# Altium PCB PCB1.PcbDoc
Units mm, origin at the board's own origin, x right, y up, seen from the top; angles counter-clockwise.
Board outline 88.27 x 53.97 mm, 2 copper layers (Top Layer, Bottom Layer); 52 components, 63 nets, 209 pads, 244 vias.
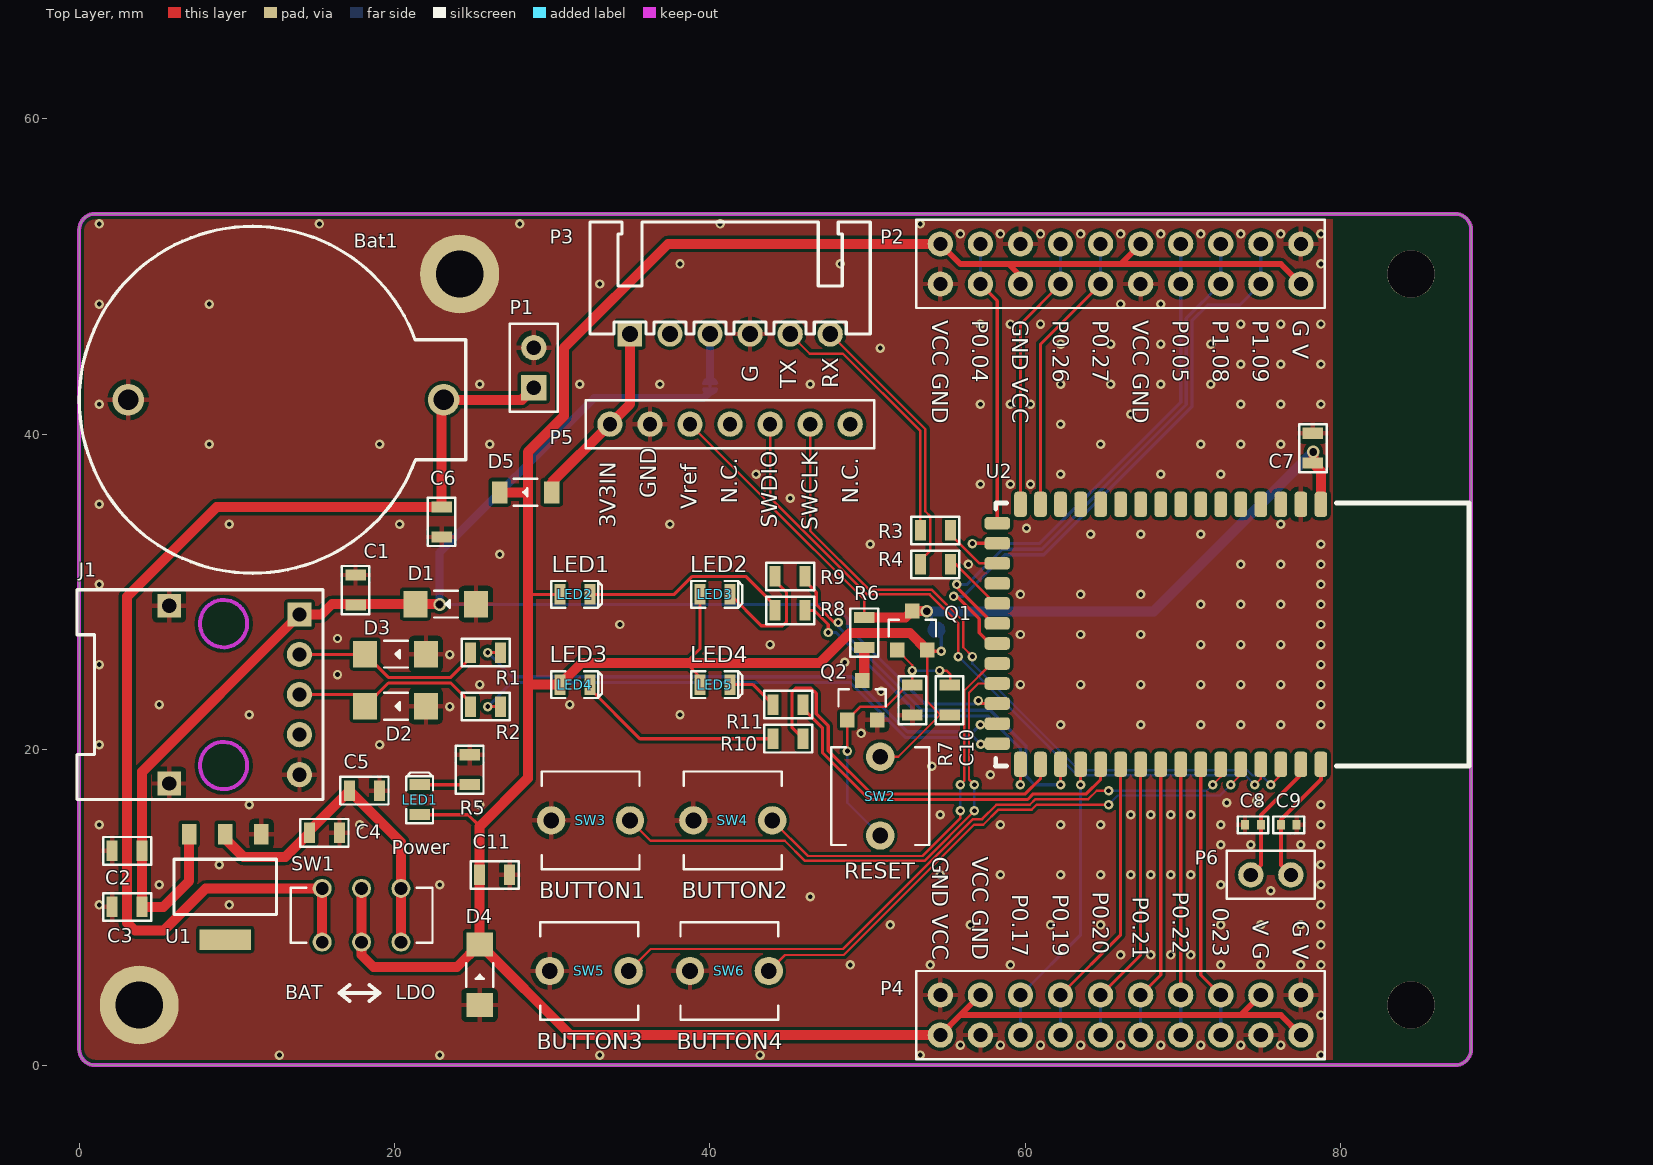
[diagram p0: Top Layer view]
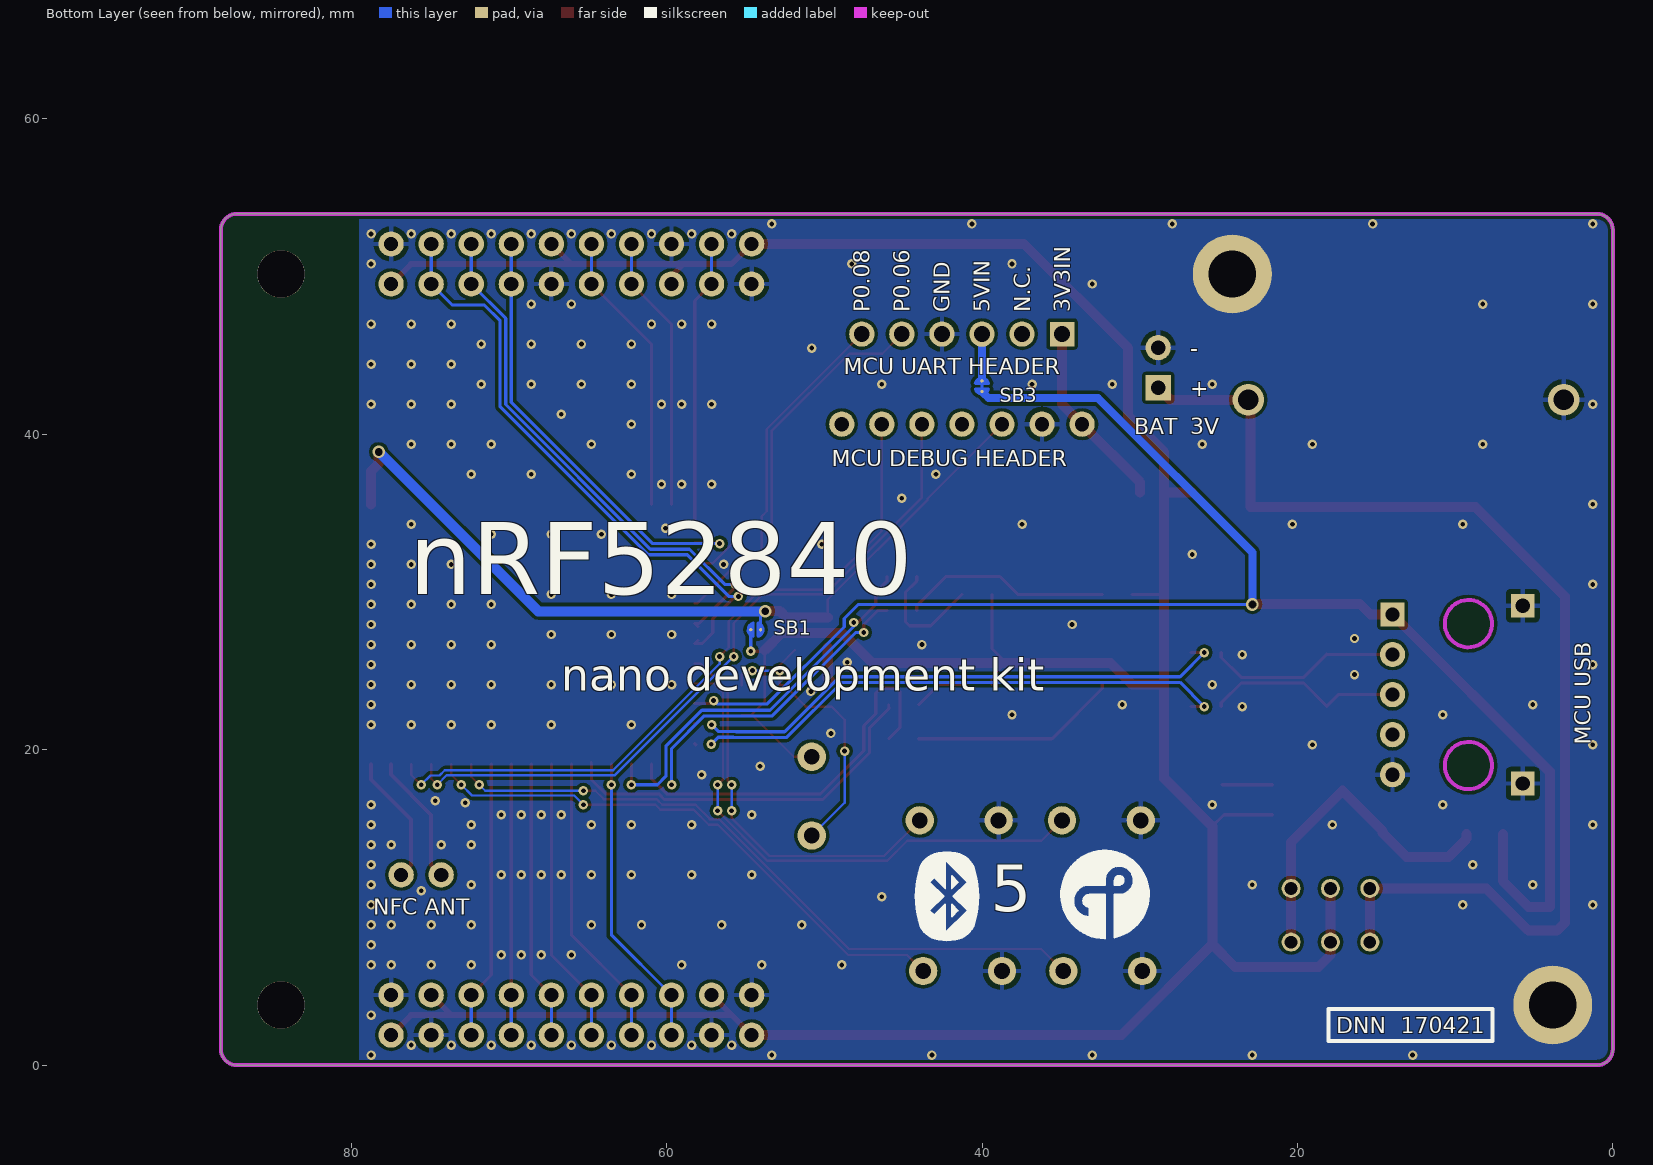
[diagram p1: Bottom Layer view, seen from below]
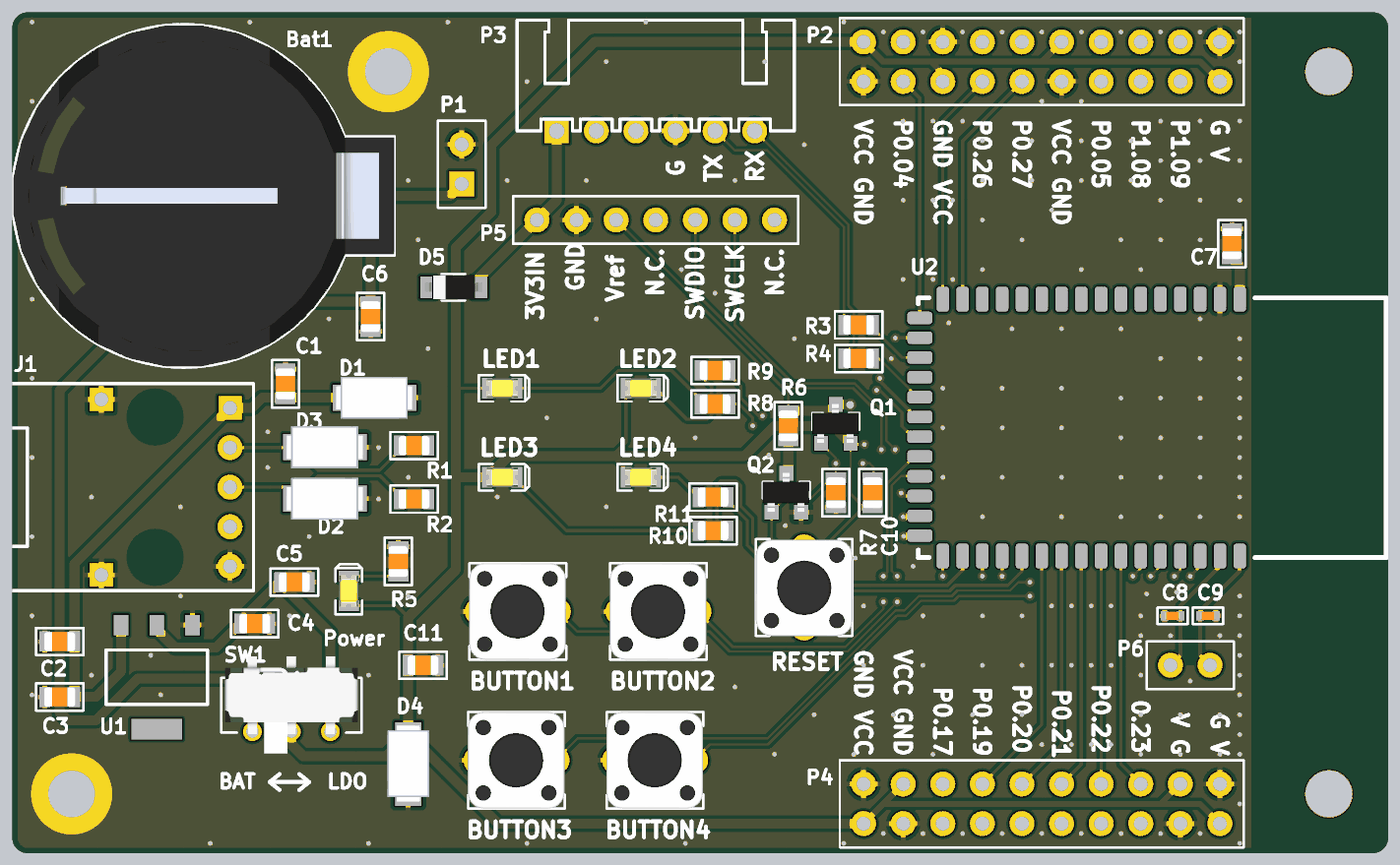
[diagram p2: 3D render of the assembled board from above, using the file's embedded part models]

## Layer stack, top to bottom
Top Solder: solder mask 0.0102, Solder Resist, Dk 3.5
Top Layer: signal copper 0.0356
Dielectric 1: dielectric 0.32, FR-4, Dk 4.8
Bottom Layer: signal copper 0.0356
Bottom Solder: solder mask 0.0102, Solder Resist, Dk 3.5

## Board outline
0,1.016 ccw(c1.016,1.016) 1.016,0 87.249,0 ccw(c87.249,1.016) 88.265,1.016 88.265,52.959 ccw(c87.249,52.959) 87.249,53.975 1.016,53.975 ccw(c1.016,52.959) 0,52.959

## Design rules (kind name [scope] priority, off if disabled: settings)
Clearance Clearance_3 [HasFootprint('Solderbridge_Small') vs InPolygon] p1: gap=0.152 ignorepadtopadclearanceinfootprint=FALSE except(0.203: Arc-Fill Arc-Poly Arc-Region Track-Fill Track-Poly Track-Region SMDPad-Fill SMDPad-Poly SMDPad-Region THPad-Fill THPad-Poly THPad-Region Via-Fill Via-Poly Via-Region Fill-Fill Fill-Poly Fill-Region Poly-Poly Poly-Region Region-Region)
Clearance Clearance_2 [HasFootprint('Solderbridge_Small')] p2: gap=0.152 ignorepadtopadclearanceinfootprint=FALSE
Clearance Clearance_1 [InNet('5V') or InNet('CP2102_3V3') or InNet('CP2102_5V') or InNet('VBAT') or InNet('VDD_nRF') or InNet('VLDO') or InNet('VSYS')] p3: gap=0.203 ignorepadtopadclearanceinfootprint=FALSE
Clearance [All] p4: gap=0.152 ignorepadtopadclearanceinfootprint=FALSE except(0.203: Arc-Fill Arc-Poly Arc-Region Track-Fill Track-Poly Track-Region SMDPad-Fill SMDPad-Poly SMDPad-Region THPad-Fill THPad-Poly THPad-Region Via-Fill Via-Poly Via-Region Fill-Fill Fill-Poly Fill-Region Poly-Poly Poly-Region Region-Region)
DiffPairsRouting [All] p1: maxlimit=0.254 minlimit=0.152 mostfreqgap=0.152 toplayer_minwidth=0.203 toplayer_maxwidth=0.381 toplayer_prefwidth=0.203 bottomlayer_minwidth=0.203 bottomlayer_maxwidth=0.381 bottomlayer_prefwidth=0.203 maxuncoupledlength=12.7
MinimumSolderMaskSliver [All] p1: minsoldermaskwidth=0.152
PolygonConnect PolygonConnect_1 [IsVia and InNet('GND') or (HasPad('Free-1') and InNet('GND'))] p1: connectstyle=Direct reliefconductorwidth=0.254 reliefentries=4 polygonreliefangle="90 Angle" airgapwidth=0.254
PolygonConnect [All] p2: connectstyle=Relief reliefconductorwidth=0.305 reliefentries=4 polygonreliefangle="90 Angle" airgapwidth=0.305
RoutingVias [All] p1: holewidth=0.3 width=0.6 viastyle="Through Hole" minholewidth=0.3 minwidth=0.6 maxholewidth=0.7 maxwidth=1
SilkToSilkClearance [All] p1: silktosilkclearance=0.203
SilkToSolderMaskClearance [IsPad] p1: minsilkscreentomaskgap=0.152 clearancetoexposedcopper=TRUE
SolderMaskExpansion [All] p1: expansion=0.102
Width [All] p1: maxlimit=2.54 minlimit=0.152 preferedwidth=0.203
26 further rules are at their usual default settings.

## Classes and differential pairs
differential pair D': +D'_P -D'_N
differential pair D: +D_P -D_N

## Components (designator, comment, footprint, x,y, rotation, side; value= is the part's Value field where it differs from the comment)
Bat1 "Bat Holder CR2032" CR2032_DIP_PLASTIC 3.114,42.189 r0 top
C1 "100nF" 0805_Imperial 17.526,30.124 r270 top
C2 "10µF" 0805_Imperial 3.048,13.589 r0 top
C3 "100nF" 0805_Imperial 3.048,10.033 r0 top
C4 "100nF" 0805_Imperial 15.555,14.732 r180 top
C5 "10uF" 0805_Imperial 18.095,17.399 r180 top
C6 "10µF" 0805_Imperial 22.987,34.442 r90 top
C7 "100nF" 0805_Imperial 78.232,39.116 r270 top
C8 "N.C." "0402 imperial" 74.43,15.24 r180 top
C9 "N.C." "0402 imperial" 76.7,15.24 r180 top
C10 "100nF" 0805_Imperial 55.194,23.139 r270 top
C11 "10uF" 0805_Imperial 26.35,12.065 r180 top
D1 "TVS" DO-214AC 23.241,29.235 r0 top
D2 "TVS" DO-214AC 20.066,22.758 r0 top
D3 "TVS" DO-214AC 20.066,26.06 r0 top
D4 "TVS" DO-214AC 25.4,5.735 r270 top
D5 "DIODE S4" SOD-123 26.672,36.322 r0 top
J1 "MicroUSB-B" USB-MICRO-B-MODULE 13.97,23.495 r0 top
LED1 "Power" LED_0805 21.59,16.83 r270 top
LED2 "LED1" LED_0805 31.43,29.845 r180 top
LED3 "LED2" LED_0805 40.32,29.845 r180 top
LED4 "LED3" LED_0805 31.43,24.13 r180 top
LED5 "LED4" LED_0805 40.32,24.13 r180 top
P1 "BAT" CONN2.54MM2P#1 28.829,42.951 r90 top
P2 "GPIO Header" CONN2.54MM10X2 77.47,52.07 r180 top
P3 "UART Header" CONNX2.54MM6P 47.625,46.355 r0 top
P4 "GPIO Header" CONN2.54MM10X2 77.47,4.445 r180 top
P5 "Prog & Debug Header" CONN2.54MM7P 33.655,40.64 r0 top
P6 "NFC ANT" CONN2.54MM2P#2 74.295,12.065 r0 top
Q1 "Si2301DS" SOT-23 52.832,27.559 r0 top
Q2 "Si2300" SOT-23 49.657,23.139 r0 top
R1 "22R" 0805_Imperial 25.781,26.162 r0 top
R2 "22R" 0805_Imperial 25.781,22.733 r0 top
R3 "22R" 0805_Imperial 54.295,33.909 r180 top
R4 "22R" 0805_Imperial 54.295,31.75 r180 top
R5 "10K" 0805_Imperial 24.765,18.73 r270 top
R6 "100R" 0805_Imperial 49.784,27.432 r90 top
R7 "100K" 0805_Imperial 52.832,23.139 r90 top
R8 "1K" 0805_Imperial 45.085,28.829 r0 top
R9 "1K" 0805_Imperial 45.085,30.988 r0 top
R10 "1K" 0805_Imperial 44.958,20.701 r0 top
R11 "1K" 0805_Imperial 44.958,22.86 r0 top
SB1 "Solderbridge" Solderbridge_Small 54.356,27.61 r180 bottom
SB3 "Solderbridge" Solderbridge_Shorted 40.005,43.053 r270 bottom net-tie
SW1 "MSS22D18" MSS22D18DIP 20.407,7.801 r0 top
SW2 "RESET" Switch-PB-6.2x6.2-2-PIN-DIP 50.8,17.058 r90 top
SW3 "BUTTON1" Switch-PB-6.2x6.2-2-PIN-DIP 32.432,15.519 r0 top
SW4 "BUTTON2" Switch-PB-6.2x6.2-2-PIN-DIP 41.449,15.519 r0 top
SW5 "BUTTON3" Switch-PB-6.2x6.2-2-PIN-DIP 32.345,5.969 r0 top
SW6 "BUTTON4" Switch-PB-6.2x6.2-2-PIN-DIP 41.235,5.969 r0 top
U1 "AMS1117-3.3" SOT229P700X180-4N 9.271,11.303 r180 top
U2 "nRF52840 module" nRF52840_GT840A01 58.218,34.357 r270 top

## Footprints (in the part's own frame and the unit in brackets; to place one, negate y for a bottom-side part, rotate by r counter-clockwise, add the part's x,y. Pads: shape width x height; smd on the part's side, far side on the other; paste and mask are expansions set on the pad)
"0402 imperial" [mm] "tolerant (L, W)=(0.1, 0.1)"
  rect 0.5x0.6 smd mask+0.05: 1(-0.5,0) 2(0.5,0)
  Top Layer pour cut-out: -0.25,0.3 0.25,0.3 0.25,-0.3 -0.25,-0.3
  silkscreen extent -0.97,-0.53 0.97,0.53, body extent -0.51,-0.25 0.51,0.25, height 0.5
0805_Imperial [mm] "tolerant (L, W)=(0.1, 0.15)"
  rect 0.7x1.3 smd mask+0.05: 1(-0.95,0) 2(0.95,0)
  silkscreen extent -1.53,-0.87 1.53,0.87, body extent -1,-0.62 1,0.63, height 0.77
CONN2.54MM2P#1 [mm]
  rect 1.6x1.6 hole 0.9: 1(0,0)
  round 1.6 hole 0.9: 2(2.54,0)
  silkscreen extent -1.52,-1.52 4.06,1.52, body extent -1.27,-1.27 3.81,1.27, height 8.5
CONN2.54MM2P#2 [mm]
  round 1.6 hole 0.9: 1(0,0) 2(2.54,0)
  silkscreen extent -1.52,-1.52 4.06,1.52, body extent -1.27,-1.27 3.81,1.27, height 8.5
CONN2.54MM7P [mm]
  round 1.6 hole 0.9: 1(0,0) 2(2.54,0) 3(5.08,0) 4(7.62,0) 5(10.16,0) 6(12.7,0) 7(15.24,0)
  silkscreen extent -1.52,-1.52 16.76,1.52, body extent -1.27,-1.27 16.51,1.27, height 8.5
CONN2.54MM10X2 [mm]
  round 1.6 hole 0.9: 1(0,0) 2(0,2.54) 3(2.54,0) 4(2.54,2.54) 5(5.08,0) 6(5.08,2.54) 7(7.62,0) 8(7.62,2.54) 9(10.16,0) 10(10.16,2.54) 11(12.7,0) 12(12.7,2.54) 13(15.24,0) 14(15.24,2.54) 15(17.78,0) 16(17.78,2.54) 17(20.32,0) 18(20.32,2.54) 19(22.86,0) 20(22.86,2.54)
  silkscreen extent -1.52,-1.52 24.38,4.06, body extent -1.27,-1.27 24.13,3.81, height 8.5
CONNX2.54MM6P [mm]
  rect 1.55x1.55 hole 1: 1(-12.7,0)
  round 1.6 hole 1: 2(-10.16,0) 3(-7.62,0) 4(-5.08,0) 5(-2.54,0) 6(0,0)
  silkscreen extent -15.24,0 2.54,7.11, body extent -14.99,0.25 2.79,7.37, height 6
CR2032_DIP_PLASTIC [mm] "PBT PLASTIC"
  round 2 hole 1.3: 1(20,0) 2(0,0)
  silkscreen extent -3.1,-11 21.4,11, body extent -3.1,-11 21.4,11, height 8.5
DO-214AC [mm]
  rect 1.52x1.68 smd: 1(-1.925,0) 2(1.925,0)
  silkscreen extent -0.72,-0.85 0.78,0.85, body extent -2.52,-1.35 2.48,1.35, height 2.15
LED_0805 [mm] "tolerant (L, W)=(0.2, 0.15)"
  rect 0.7x1.3 smd mask+0.05: 1(-0.95,0) 2(0.95,0)
  silkscreen extent -1.73,-0.85 1.5,0.85, body extent -1.01,-0.62 1.01,0.63, height 1.1
MSS22D18DIP [mm]
  round 1.2 hole 0.8: 1(0,0) 2(-2.5,0) 3(-5,0) 4(0,3.4) 5(-2.5,3.4) 6(-5,3.4)
  silkscreen extent -7,-0.05 2,3.45, body extent -6.75,-1.4 1.75,4.85, height 3.5
nRF52840_GT840A01 [mm] "mechanical 31 tolerance 0.75mm"
  rrect50% 1.6x0.8 smd: 1(-1.203,20.522) 2(-1.203,19.252) 3(-1.203,17.982) 4(-1.203,16.712) 5(-1.203,15.442) 6(-1.203,14.172) 7(-1.203,12.902) 8(-1.203,11.632) 9(-1.203,10.362) 10(-1.203,9.092) 11(-1.203,7.822) 12(-1.203,6.552) 13(-1.203,5.282) 14(-1.203,4.012) 15(-1.203,2.742) 16(-1.203,1.472) 29(15.282,1.472) 30(15.282,2.742) 31(15.282,4.012) 32(15.282,5.282) 33(15.282,6.552) 34(15.282,7.822) 35(15.282,9.092) 36(15.282,10.362) 37(15.282,11.632) 38(15.282,12.902) 39(15.282,14.172) 40(15.282,15.442) 41(15.282,16.712) 42(15.282,17.982) 43(15.282,19.252) 44(15.282,20.522)
  rrect50% 0.8x1.6 smd: 17(0,0) 18(1.27,0) 19(2.54,0) 20(3.81,0) 21(5.08,0) 22(6.35,0) 23(7.62,0) 24(8.89,0) 25(10.16,0) 26(11.43,0) 27(12.7,0) 28(13.97,0)
  silkscreen extent -1.28,-0.1 15.38,29.92, body extent -1.28,-0.1 15.28,29.92, height 2
SOD-123 [mm]
  rect 1x1.4 smd: 1(0,0) 2(3.3,0)
  silkscreen extent 0.87,-0.85 2.37,0.85, body extent -0.2,-0.8 3.5,0.8, height 1.27
Solderbridge_Shorted [mm]
  round 0.2 smd paste-10: 1(-0.338,0) 2(0.338,0)
  Top Layer region: 0.102,0.432 0.178,0.505 0.296,0.467 0.361,0.424 0.434,0.351 0.488,0.292 0.546,0.193 0.574,0.099 0.569,-0.122 0.544,-0.193 0.46,-0.33 0.376,-0.411 0.284,-0.469 0.183,-0.5 0.132,-0.483 0.102,-0.43
  Top Layer region: -0.102,-0.432 -0.178,-0.505 -0.296,-0.467 -0.361,-0.424 -0.434,-0.351 -0.488,-0.292 -0.546,-0.193 -0.574,-0.099 -0.569,0.122 -0.544,0.193 -0.46,0.33 -0.376,0.411 -0.284,0.469 -0.183,0.5 -0.132,0.483 -0.102,0.43
  Top Layer lines w0.152: 0.178,0.431 cw(c0.068,0) 0.178,-0.431 ; -0.178,0.431 ccw(c-0.068,0) -0.178,-0.431
  Top Layer lines w0.203: 0.338,0 -0.338,0
Solderbridge_Small [mm]
  round 0.2 smd paste-10: 1(-0.312,0) 2(0.312,0)
  round 1.1 on Bottom Paste mask+0.05: ""(0,0)
  Top Layer region: -0.077,-0.432 -0.152,-0.505 -0.271,-0.467 -0.335,-0.424 -0.409,-0.351 -0.462,-0.292 -0.521,-0.193 -0.549,-0.099 -0.544,0.122 -0.518,0.193 -0.434,0.33 -0.351,0.411 -0.259,0.469 -0.157,0.5 -0.107,0.483 -0.077,0.43
  Top Layer region: 0.077,0.432 0.152,0.505 0.271,0.467 0.335,0.424 0.409,0.351 0.462,0.292 0.521,0.193 0.549,0.099 0.544,-0.122 0.518,-0.193 0.434,-0.33 0.351,-0.411 0.259,-0.469 0.157,-0.5 0.107,-0.483 0.077,-0.43
  Top Layer lines w0.152: 0.153,-0.431 ccw(c0.042,0) 0.461,0.149 ccw(c0.042,0) 0.312,0.353 ccw(c0.042,0) 0.153,0.431 ; -0.153,-0.431 cw(c-0.042,0) -0.305,-0.359 cw(c-0.042,0) -0.312,-0.353 cw(c-0.042,0) -0.487,0 cw(c-0.042,0) -0.153,0.431
SOT229P700X180-4N [mm]
  rect 0.93x1.31 smd: 1(-2.285,-3.345) 2(0.005,-3.345) 3(2.295,-3.345)
  rect 3.24x1.31 smd: 4(0.005,3.345)
  silkscreen extent -3.25,-1.75 3.25,1.75
SOT-23 [mm] "1-G 2-S 3-D"
  rect 0.9x0.95 smd mask+0.05: 1(-0.95,-1.25) 2(0.95,-1.25) 3(0,1.25)
  silkscreen extent -1.51,-0.38 1.5,0.69, body extent -1.52,-1.23 1.48,1.27, height 1.06
Switch-PB-6.2x6.2-2-PIN-DIP [mm] "Single Pole Single Throw (SPST)"
  round 1.8 hole 1: 1(-2.5,0) 2(2.5,0)
  silkscreen extent -3.1,-3.1 3.1,3.1, body extent -3.13,-3.1 3.07,3.1, height 4.8
USB-MICRO-B-MODULE [mm]
  rect 1.5x1.5 hole 0.9: 1(0,5.08) 6(-8.258,-5.634) 6(-8.258,5.634)
  round 1.6 hole 0.9: 2(0,2.54) 3(0,0) 4(0,-2.54) 5(0,-5.08)
  Keep-Out Layer circle w0.254: c-4.81,4.5 r1.5
  Keep-Out Layer circle w0.254: c-4.81,-4.5 r1.5
  silkscreen extent -14.1,-6.65 1.5,6.65, body extent -14.08,-6.65 1.5,6.65, height 1.6

## Part data
Bat1: "Bat Holder CR2032 SMD", Note="Bat Holder CR2032"
C1 C2 C3 C4 C5 C6 C7 C8 C9 C11: library part Capacitor, "common library", Tolerance=±5%
C10: library part Capacitor, "Genaral Schematic", Tolerance=±5%
D1 D2 D3 D4 D5: library part Diode, "common library"
J1: "MicroUSB-B-SMT", 2nd source part number=609-4616-1-ND, Manufacturer="Allen Creations Corp.", Manufacturer Part Number=AJU55-BS2111-L, Part Number=USB-Micro-B-RA-SMD-PiP, Part number IPS=00000007790, 2nd source Supplier=Digi-Key, Artikkelnr Noca=55029020, Artikkelnr Simpro=N.A., Datasheet="\\hizz\pro\app9717\Datasheet\connectores\Allen Creations Corp\AJU-211.pdf", Footprint Doc=USB-Micro-B-RA-SMD-PiP, LatestRevisionDate=2016-04-21, Pin Count=5, Published=2014-10-07, Publisher="Nordic Semiconductor", Supplier=Cabcon, Supplier part number=AJU55-BS2111-L
LED1 LED2 LED3 LED4 LED5: library part LED, "common library", Color=Green
  LED1: Function=Power
  LED2: Function=LED1
  LED3: Function=LED2
  LED4: Function=LED3
  LED5: Function=LED4
P1 P6: library part "Header 2"
P2 P4: library part "Header 10x2"
P3: library part "Header 6", "common library", Compatibility="Pinout of CP2102 USB-UART Module ( at hshop.vn)"
P5: library part "Header 7"
Q1: library part MOS-P, "SOT-23 1-G 2-S 3-D"
Q2: library part MOS-N, "SOT-23 1-G 2-S 3-D"
R1 R2 R3 R4 R5 R8 R9 R10 R11: library part Resistor, "common library", Tolerance=±5%
R6 R7: library part Resistor, "General Schematic", Tolerance=±5%
SB3: "Shorted Solderbridge", Part Number="Solderbridge Shorted", Artikkelnr Noca=N.A., Artikkelnr Simpro=N.A., Footprint Doc=Solderbridge_Shorted, LatestRevisionDate=2012-08-07, Pin Count=2, Published=2012-08-07, Publisher="Nordic Semiconductor"
SW1: "slide switch, DPDT", Pin Count=6
SW2 SW3 SW4 SW5 SW6: library part Push-Button-2, "2-pin"
U1: library part AMS1117, "Low-dropout regulator", Type=AMS1117-3.3
U2: library part nRF52840_GT840A01, "nRF52840 module GT840A_01"
SB1: Artikkelnr Noca=N.A., Artikkelnr Simpro=N.A., Footprint Doc=Solderbridge, LatestRevisionDate=2009-12-14, Part Number=Solderbridge, Pin Count=2, Published=2009-12-14, Publisher="Nordic Semiconductor"

## Free pads (board coordinates)
  round 5 hole 3: 1(3.81,3.81) 1(24.13,50.165)
  round 3 hole 3: 1(84.455,3.81) 1(84.455,50.165)

## Via types
v1: diameter 0.6, hole 0.3, Top Layer to Bottom Layer, tented both sides, 241 vias
v2: diameter 0.8, hole 0.5, Top Layer to Bottom Layer, tented both sides, 3 vias

## Nets (pads, with @x,y where several pads share a name; then routed paths per layer and width w, separated by ;. In a path a pad name is that pad's centre, name@x,y a point inside that pad or via, vN(x,y) a via of type N, cw(c..) or ccw(c..) an arc to the next point about the centre after c; other vN are vias at no path point)
5V: C1.2 C2.2 C3.2 D1.1 J1.1 SB3.2 U1.3 U2.26 | length 101.5
  Top Layer w0.203: v1(57.023,23.114) 57.21,22.927 U2.26
  Top Layer w0.635: U1.3 6.976,11.675 5.334,10.033 C3.2 C2.2 3.998,18.603 J1.1 15.367,28.575 16.027,29.235 D1.1 22.835,29.235 v2(22.86,29.21)
  Bottom Layer w0.203: v2(22.86,29.21) 47.845,29.21 48.738,28.318 48.738,27.783 53.615,22.906 56.815,22.906 v1(57.023,23.114)
  Bottom Layer w0.508: v2(22.86,29.21) 22.86,32.512 32.639,42.291 39.581,42.291 39.933,42.643
CP2102_3V3: D5.2 P3.1 P5.1 | length 12.1
  Top Layer w0.635: D5.2 29.972,36.957 P5.1 34.925,41.91 P3.1
CP2102_5V: P3.3 SB3.1 | length 2.9
  Bottom Layer w0.508: SB3.1@40.005,43.434 P3.3
CP2102RXD: P3.5 R3.2 | length 17.1
  Top Layer w0.152: P3.5 46.33,45.11 48.439,45.11 53.345,40.204 R3.2
CP2102TXD: P3.6 R4.2 | length 17.5
  Top Layer w0.152: P3.6 53.65,40.33 53.65,35.123 53.975,34.798 53.975,32.639 53.345,32.009 R4.2
D'_N: D3.1 J1.2 R1.1 | length 12.3
  Top Layer w0.203: J1.2 18.116,26.035 D3.1 19.614,24.587 23.571,24.587 24.831,25.847 R1.1
D'_P: D2.1 J1.3 R2.1 | length 12.5
  Top Layer w0.203: J1.3 17.404,23.495 D2.1 19.614,24.232 23.571,24.232 24.831,22.972 R2.1
D_N: R1.2 U2.27 | length 34.4
  Top Layer w0.203: v1(25.908,26.162) R1.2 ; U2.27@58.151,21.59 U2.27
  Bottom Layer w0.203: v1(25.908,26.162) 27.445,24.625 49.03,24.625 52.522,21.133 55.593,21.133 55.606,21.145 56.706,21.145 v1(57.15,21.59)
D_P: R2.2 U2.28 | length 34.5
  Top Layer w0.203: v1(25.908,22.733) R2.2 ; U2.28@58.151,20.32 U2.28
  Bottom Layer w0.203: v1(25.908,22.733) 27.445,24.27 48.882,24.27 52.375,20.777 55.74,20.777 55.753,20.79 56.731,20.79 v1(57.175,20.345)
GND: Bat1.2 C1.1 C2.1 C3.1 C4.1 C5.1 C6.1 C7.1 C8.2 C9.1 C11.1 D1.2 D2.2 D3.2 D4.2 J1.5 J1.6 P1.2 P2.1 P2.10 P2.15 P2.20 P3.4 P4.1 P4.4 P4.18 P4.19 P5.2 pad.1@3.81,3.81 pad.1@24.13,50.165 Q2.2 R5.1 R7.1 SW3.1 SW4.1 SW5.1 SW6.1 U1.1 U2.2
  other v1: 12.7,0.635 22.86,0.635 33.02,0.635 43.18,0.635 53.34,0.635 78.74,0.635 55.88,1.27 58.42,1.27 60.96,1.27 63.5,1.27 66.04,1.27 68.58,1.27 71.12,1.27 73.66,1.27 76.2,1.27 78.74,3.175 48.895,6.35 53.975,6.35 59.055,6.35 72.39,6.35 74.93,6.35 77.47,6.35 78.74,6.35 66.04,6.985 67.945,6.985 69.215,6.985 70.485,6.985 78.74,7.62 51.435,8.89 56.515,8.89 61.595,8.89 64.77,8.89 72.39,8.89 74.93,8.89 77.47,8.89 78.74,8.89 1.27,10.16 9.525,10.16 78.74,10.16 46.355,10.668 75.565,11.049 5.08,11.43 22.86,11.43 72.39,11.43 78.74,11.43 54.61,12.065 58.42,12.065 62.23,12.065 64.77,12.065 66.675,12.065 67.945,12.065 69.215,12.065 70.485,12.065 8.89,12.7 78.74,12.7 72.39,13.97 74.295,13.97 77.47,13.97 78.74,13.97 1.27,15.24 17.78,15.24 58.42,15.24 62.23,15.24 64.77,15.24 72.39,15.24 78.74,15.24 54.61,15.875 66.675,15.875 67.945,15.875 69.215,15.875 70.485,15.875 10.795,16.51 25.4,16.51 78.74,16.51 72.771,16.637 74.676,16.764 57.785,18.415 54.077,18.948 1.27,20.32 19.05,20.32 49.581,21.031 62.23,21.59 67.31,21.59 71.12,21.59 73.66,21.59 76.2,21.59 78.74,21.59 10.795,22.225 38.1,22.225 23.495,22.733 5.08,22.86 31.115,22.86 78.74,22.86 50.851,23.698 25.4,24.13 59.69,24.13 63.5,24.13 67.31,24.13 71.12,24.13 73.66,24.13 76.2,24.13 78.74,24.13 16.383,24.765 1.27,25.4 78.74,25.4 48.539,25.552 23.495,26.035 43.815,26.67 71.12,26.67 73.66,26.67 76.2,26.67 78.74,26.67 16.383,27.051 59.69,27.305 63.5,27.305 67.31,27.305 34.29,27.94 78.74,27.94 71.12,29.21 73.66,29.21 76.2,29.21 78.74,29.21 59.69,29.845 63.5,29.845 67.31,29.845 1.27,30.48 78.74,30.48 56.388,31.75 73.66,31.75 76.2,31.75 78.74,31.75 26.67,32.385 50.165,33.02 78.74,33.02 64.135,33.655 67.31,33.655 71.12,33.655 60.071,34.036 9.525,34.29 20.32,34.29 37.465,34.29 76.2,34.29 1.27,35.56 45.085,35.941 57.15,36.83 59.055,36.83 60.325,36.83 42.926,37.465 62.23,37.465 68.58,37.465 72.39,37.465 8.255,39.37 19.05,39.37 26.035,39.37 64.77,39.37 71.12,39.37 73.66,39.37 76.2,39.37 62.23,40.64 66.675,41.275 1.27,41.91 57.15,41.91 59.055,41.91 60.325,41.91 73.66,41.91 76.2,41.91 78.74,41.91 25.4,43.18 31.75,43.18 36.83,43.18 46.355,43.18 62.23,43.18 65.405,43.18 68.58,43.18 71.755,43.18 73.66,44.45 76.2,44.45 78.74,44.45 50.8,45.466 62.23,45.72 65.405,45.72 68.58,45.72 71.755,45.72 57.15,46.99 59.055,46.99 60.96,46.99 73.66,46.99 76.2,46.99 78.74,46.99 1.27,48.26 8.255,48.26 66.04,48.26 68.58,48.26 33.02,49.53 38.1,50.8 48.26,50.8 78.74,50.8 55.88,52.705 58.42,52.705 60.96,52.705 63.5,52.705 66.04,52.705 68.58,52.705 71.12,52.705 73.66,52.705 76.2,52.705 78.74,52.705 1.27,53.34 15.24,53.34 27.94,53.34 40.64,53.34 53.34,53.34
"J-link nRST": P5.4
"J-link SWCLK": P5.6 U2.42 | length 45.4
  Top Layer w0.152: P5.6 46.355,33.882 50.087,30.15 54.051,30.15 56.058,28.143 56.058,26.492 v1(56.642,25.908) ; v1(75.565,17.78) 76.2,18.415 U2.42
  Bottom Layer w0.152: v1(56.642,25.908) 56.642,25.45 63.398,18.694 74.066,18.694 74.396,18.364 74.981,18.364 v1(75.565,17.78)
"J-link SWDIO": P5.5 U2.41 | length 45.6
  Top Layer w0.152: P5.5 43.815,35.991 49.961,29.845 53.925,29.845 55.753,28.017 v1(55.753,25.908) ; v1(74.549,17.78) 74.93,18.161 U2.41
  Bottom Layer w0.152: v1(55.753,25.908) 63.271,18.39 73.939,18.39 v1(74.549,17.78)
"J-link SWO": P5.7
NetC10_1: C10.1 Q1.1 Q2.1 R7.2 SW2.1 | length 19
  Top Layer w0.152: v1(48.717,19.914) 48.717,21.879 Q2.1 49.551,22.733 51.181,22.733 52.537,24.089 R7.2 v1(52.832,25.019) 52.832,25.359 Q1.1 ; v1(54.559,25.019) 54.991,25.019 55.245,24.765 C10.1@55.245,24.089
  Bottom Layer w0.152: v1(48.717,19.914) 48.717,16.641 SW2.1 ; v1(52.832,25.019) v1(54.559,25.019)
NetLED1_1: LED1.1 R5.2 | length 3.2
  Top Layer w0.203: LED1.1 R5.2
NetLED2_1: LED2.1 R8.1 | length 13.3
  Top Layer w0.203: LED2.1 37.744,29.845 38.887,30.988 42.266,30.988 44.135,29.119 R8.1
NetLED3_1: LED3.1 R9.1 | length 7.7
  Top Layer w0.203: LED3.1 43.251,27.864 44.602,27.864 44.856,28.118 44.856,29.972 44.135,30.693 R9.1
NetLED4_1: LED4.1 R10.1 | length 13.2
  Top Layer w0.203: LED4.1 32.38,23.881 35.56,20.701 R10.1
NetLED5_1: LED5.1 R11.1 | length 3.3
  Top Layer w0.203: LED5.1 42.738,24.13 R11.1
NetP3_2: P3.2
NetQ2_3: Q2.3 R6.1 | length 2.1
  Top Layer w0.635: Q2.3 49.784,24.516 R6.1
P0.02: U2.10
P0.03: U2.9
P0.04: P2.17 P2.18 U2.17 | length 18.2
  Top Layer w0.203: P2.18 58.218,48.462 U2.17
  Bottom Layer w0.203: P2.18 P2.17
P0.05: P2.7 P2.8 U2.18 | length 28.5
  Top Layer w0.203: v1(56.642,33.071) 56.658,33.087 U2.18
  Bottom Layer w0.203: v1(56.642,33.071) 60.884,33.071 69.85,42.037 P2.8 P2.7
P0.06: R3.1 U2.19 | length 4
  Top Layer w0.152: R3.1 55.245,33.655 57.083,31.817 U2.19
P0.07: U2.20
P0.08: R4.1 U2.21 | length 4.3
  Top Layer w0.152: R4.1@55.245,31.42 R4.1 55.609,31.75 58.082,29.277 U2.21
P0.09: C8.1 P6.1 U2.43 | length 8.3
  Top Layer w0.254: P6.1 74.93,12.7 C8.1 74.93,15.875 77.47,18.415 U2.43
P0.10: C9.2 P6.2 U2.44 | length 8.3
  Top Layer w0.254: P6.2 76.2,12.7 C9.2 76.2,15.57 78.74,18.11 U2.44
P0.11: SW3.2 U2.25 | length 33.9
  Top Layer w0.152: SW3.2 36.227,14.224 44.748,14.224 46.018,12.954 53.594,12.954 v1(56.769,16.129) ; v1(56.769,17.78) 56.428,18.121 56.428,23.612 57.013,24.197 U2.25
  Bottom Layer w0.152: v1(56.769,16.129) v1(56.769,17.78)
P0.12: SW4.2 U2.24 | length 24.8
  Top Layer w0.152: SW4.2 46.21,13.259 53.468,13.259 55.88,15.671 v1(55.88,16.129) ; v1(55.88,17.78) 56.124,18.024 56.124,23.739 57.852,25.467 U2.24
  Bottom Layer w0.152: v1(55.88,16.129) v1(55.88,17.78)
P0.13: R8.2 U2.29 | length 21.2
  Top Layer w0.203: R8.2 46.609,28.829 47.498,27.94 v1(47.498,27.432) ; v1(59.69,17.78) U2.29
  Bottom Layer w0.203: v1(47.498,27.432) 48.006,27.432 53.294,22.144 57.617,22.144 59.69,20.071 v1(59.69,17.78)
P0.14: R9.2 U2.31 | length 24.9
  Top Layer w0.203: R9.2 46.035,30.673 46.736,29.972 46.736,29.21 47.879,28.067 v1(48.133,28.067) ; v1(62.23,17.78) U2.31
  Bottom Layer w0.203: v1(48.133,28.067) 48.133,27.813 53.446,22.5 57.764,22.5 60.046,20.218 60.046,18.313 60.579,17.78 v1(62.23,17.78)
P0.15: R10.2 U2.30 | length 24.9
  Top Layer w0.203: R10.2 45.212,21.397 45.212,23.673 45.441,23.901 46.406,23.901 46.736,23.571 46.736,22.271 47.498,21.509 47.498,19.939 50.241,17.196 59.995,17.196 60.96,18.161 U2.30
P0.16: R11.2 U2.33 | length 24.1
  Top Layer w0.152: R11.2@45.908,22.672 R11.2 ; U2.33 U2.33@64.77,19.212
  Top Layer w0.203: R11.2@45.908,22.672 45.908,22.596 47.142,21.361 47.142,19.792 50.094,16.84 60.142,16.84 60.498,17.196 63.856,17.196 64.77,18.11 U2.33
P0.17: P4.15 P4.16 U2.32 | length 18.7
  Top Layer w0.203: v1(63.5,17.78) U2.32
  Bottom Layer w0.203: P4.16 P4.15 63.5,8.255 v1(63.5,17.78)
P0.19: P4.13 P4.14 U2.34 | length 18.7
  Top Layer w0.203: P4.13 66.04,8.255 U2.34
  Bottom Layer w0.203: P4.14 P4.13
P0.20: P4.11 P4.12 U2.35 | length 18.2
  Top Layer w0.203: P4.11 67.31,6.985 U2.35
  Bottom Layer w0.203: P4.12 P4.11
P0.21: P4.9 P4.10 U2.36 | length 17.7
  Top Layer w0.203: P4.9 68.58,5.715 U2.36
  Bottom Layer w0.203: P4.10 P4.9
P0.22: P4.7 P4.8 U2.37 | length 17.2
  Top Layer w0.203: P4.7 U2.37
  Bottom Layer w0.203: P4.8 P4.7
P0.23: P4.5 P4.6 U2.38 | length 17.7
  Top Layer w0.203: U2.38 71.12,5.715 P4.5
  Bottom Layer w0.203: P4.6 P4.5
P0.24: SW5.2 U2.39 | length 43.4
  Top Layer w0.152: SW5.2 36.242,7.366 48.437,7.366 56.671,15.6 57.256,15.6 58.166,16.51 60.279,16.51 60.634,16.866 63.992,16.866 64.526,17.399 v1(65.278,17.399) ; v1(71.882,17.78) 72.39,18.288 U2.39
  Bottom Layer w0.152: v1(65.278,17.399) 71.501,17.399 v1(71.882,17.78)
P0.25: SW6.2 U2.40 | length 35.7
  Top Layer w0.152: SW6.2 44.751,6.985 48.487,6.985 56.742,15.24 57.327,15.24 58.292,16.205 60.405,16.205 60.71,16.51 v1(65.278,16.51) ; v1(73.025,17.78) 73.66,18.415 U2.40
  Bottom Layer w0.152: v1(65.278,16.51) 65.862,17.094 72.339,17.094 v1(73.025,17.78)
P0.26: P2.13 P2.14 U2.16 | length 17.6
  Top Layer w0.203: U2.16 59.69,46.99 P2.14
  Bottom Layer w0.203: P2.14 P2.13
P0.27: P2.11 P2.12 U2.15 | length 18.1
  Top Layer w0.203: U2.15 60.96,45.72 P2.12
  Bottom Layer w0.203: P2.12 P2.11
P0.28: U2.11
P0.29: U2.12
P0.30: U2.13
P0.31: U2.14
P1.08: P2.5 P2.6 U2.22 | length 34.3
  Top Layer w0.203: v1(55.651,30.48) 55.651,30.298 57.942,28.007 U2.22 U2.22@58.024,27.813
  Bottom Layer w0.203: v1(55.651,30.48) 56.317,30.48 58.552,32.715 61.031,32.715 70.206,41.89 70.206,47.346 P2.6 P2.5
P1.09: P2.3 P2.4 U2.23 | length 38.2
  Top Layer w0.203: v1(55.448,29.718) 55.651,29.718 57.074,28.296 57.074,27.407 57.743,26.737 U2.23 U2.23@58.032,26.924
  Bottom Layer w0.203: v1(55.448,29.718) 56.058,29.718 58.699,32.36 61.178,32.36 70.561,41.742 70.561,47.198 71.559,48.197 73.596,48.197 P2.4 P2.3
P1.10: U2.3
P1.11: U2.4
P1.12: U2.5
P1.13: U2.6
P1.14: U2.7
P1.15: U2.8
VBAT: Bat1.1 C6.2 P1.1 SW1.3 SW1.6 | length 72.9
  Top Layer w0.635: SW1.3 SW1.6 8.026,11.201 5.359,8.534 3.531,8.534 3.048,9.017 3.048,29.718 8.722,35.392 C6.2 22.987,42.062 Bat1.1 28.067,42.189 P1.1
VDD_nRF: C7.2 P5.3 Q1.3 R6.2 SB1.2 U2.1 | length 54.5
  Top Layer w0.152: P5.3 43.459,35.916 43.459,35.844 49.784,29.519 R6.2
  Top Layer w0.635: R6.2 52.405,28.382 Q1.3 53.716,28.809 v2(53.746,28.778) ; v2(78.257,38.887) 78.257,38.191 C7.2 78.74,37.658 U2.1
  Bottom Layer w0.203: v2(53.746,28.778) 54.044,28.481 54.044,27.963 SB1.2
  Bottom Layer w0.635: v2(53.746,28.778) 68.148,28.778 v2(78.257,38.887)
VLDO: C4.2 C5.2 SW1.1 SW1.4 U1.2 | length 21.4
  Top Layer w0.635: U1.2 9.266,14.356 10.414,13.208 13.081,13.208 C4.2 14.605,14.859 C5.2 20.407,14.137 SW1.4 SW1.1
VSYS: C10.2 C11.2 D4.1 D5.1 LED1.2 LED2.2 LED3.2 LED4.2 LED5.2 P2.2 P2.9 P2.16 P2.19 P4.2 P4.3 P4.17 P4.20 Q1.2 SB1.1 SW1.2 SW1.5 SW2.2 | length 219.5
  Top Layer w0.152: SW2.2 51.943,19.558 54.574,22.189 C10.2@54.646,22.189 ; Q1.2 53.782,23.053 C10.2@54.646,22.189 ; C10.2@55.245,22.189 C10.2 C10.2@54.646,22.189
  Top Layer w0.203: LED1.2 24.658,15.88 25.4,15.138 ; C11.2 C11.2@25.4,12.07 ; 28.448,29.845 LED2.2 ; LED5.2 39.37,24.613 38.481,25.502 39.37,26.391 LED3.2 ; Q1.2 53.853,26.238 v1(54.661,26.238)
  Top Layer w0.381: P4.20 55.88,3.175 ; P2.19 55.88,50.8 58.928,50.8 ; P4.17 55.88,3.175 ; P2.16 59.69,50.038 58.928,50.8 ; P2.9 66.04,50.8 ; P4.3 73.66,3.175 ; P4.2 76.2,3.175 73.66,3.175 ; P2.2 76.2,50.8 66.04,50.8 ; 55.88,3.175 73.66,3.175 ; 58.928,50.8 66.04,50.8
  Top Layer w0.635: SW1.5 SW1.2 17.907,6.985 18.669,6.223 23.963,6.223 D4.1 ; C11.2 D4.1 ; C11.2@25.4,12.07 25.4,15.138 28.448,18.186 28.448,24.13 ; D5.1 28.448,36.322 ; Q1.2 52.684,27.407 48.87,27.407 46.965,25.502 38.481,25.502 31.852,25.502 LED4.2 28.448,24.13 ; P4.20 31.155,1.905 D4.1 ; P2.19 37.338,52.07 30.734,45.466 30.734,41.148 28.448,38.862 28.448,36.322 ; 28.448,24.13 28.448,29.845 28.448,36.322
  Bottom Layer w0.203: v1(54.661,26.238) 54.661,27.251 54.661,27.602 SB1.1
pads on no net: J1.4 SB1. U1.4

## Polygon pours and split planes (outlines as drawn)
GND on Top Layer "Top Layer-GND" (solid, remove dead copper, pour order 0): -8.915,55.474 96.85,55.474 96.85,-5.918 -8.915,-5.918
GND on Bottom Layer "Bot Layer-GND" (solid, remove dead copper, pour order 2): -7.044,60.436 112.217,60.436 112.217,-6.569 -7.044,-6.569

## Keep-outs
Keep-Out Layer:
  the board outline again, w0.254

## Other copper
Top Layer:
  pour cut-out: 79.477,56.515 79.477,-2.908 97.384,-2.908 97.384,56.515
  pour cut-out: 77.47,18.212 74.93,15.672 74.93,12.7 74.295,12.065 76.835,12.065 76.2,12.7 76.2,15.57 78.74,18.11 78.74,19.075 77.47,19.075
Bottom Layer:
  pour cut-out: 79.477,64.046 79.477,-2.273 94.031,-2.273 94.031,64.046

## Silkscreen, mask and mechanical layers (free items; w line width, h text height)
Top Overlay:
  lines w0.254: 17.145,4.064 16.51,4.572 ; 17.145,5.08 16.51,4.572 ; 18.415,4.064 19.05,4.572 ; 18.415,5.08 19.05,4.572 ; 16.51,4.572 19.05,4.572
  text "VCC GND" at 54.102,47.244 h1.02 r270
  text "P0.04" at 56.642,47.244 h1.02 r270
  text "GND VCC" at 59.182,47.244 h1.02 r270
  text "P0.26" at 61.722,47.244 h1.02 r270
  text "P0.27" at 64.262,47.244 h1.02 r270
  text "VCC GND" at 66.802,47.244 h1.02 r270
  text "P0.05" at 69.342,47.244 h1.02 r270
  text "P1.08" at 71.882,47.244 h1.02 r270
  text "P1.09" at 74.422,47.244 h1.02 r270
  text "G V" at 76.962,47.244 h1.02 r270
  text "G" at 43.053,43.307 h1.02 r90
  text "TX" at 45.466,42.926 h1.02 r90
  text "RX" at 48.133,42.926 h1.02 r90
  text "GND" at 36.597,35.94 h1.02 r90
  text "N.C." at 41.719,35.602 h1.02 r90
  text "N.C." at 49.403,35.602 h1.02 r90
  text "Vref" at 39.158,35.263 h1.02 r90
  text "3V3IN" at 34.036,34.078 h1.02 r90
  text "SWDIO" at 44.281,34.078 h1.02 r90
  text "SWCLK" at 46.842,33.909 h1.02 r90
  text "GND VCC" at 54.102,13.208 h1.02 r270
  text "VCC GND" at 56.642,13.208 h1.02 r270
  text "P0.20" at 64.262,11.007 h1.02 r270
  text "P0.22" at 69.342,11.007 h1.02 r270
  text "P0.17" at 59.182,10.838 h1.02 r270
  text "P0.19" at 61.722,10.838 h1.02 r270
  text "P0.21" at 66.802,10.669 h1.02 r270
  text "0.23" at 71.882,9.992 h1.02 r270
  text "V G" at 74.422,9.145 h1.02 r270
  text "G V" at 76.962,9.145 h1.02 r270
  text "BAT" at 13.081,4.191 h0.89
  text "LDO" at 20.066,4.191 h0.89
Bottom Overlay:
  drawing of 58 lines, arcs and shapes, not listed
  text "3V3IN" at 34.417,47.752 h1.02 r270
  text "N.C." at 36.957,47.752 h1.02 r270
  text "5VIN" at 39.497,47.752 h1.02 r270
  text "GND" at 42.037,47.752 h1.02 r270
  text "P0.06" at 44.577,47.752 h1.02 r270
  text "P0.08" at 47.117,47.752 h1.02 r270
  text "-" at 26.797,44.958 h1.02
  text "MCU UART HEADER" at 48.768,43.815 h1.02
  text "+" at 26.797,42.418 h1.02
  text "3V" at 26.797,40.005 h1.02
  text "BAT" at 30.353,40.005 h1.02
  text "MCU DEBUG HEADER" at 49.53,37.973 h1.02
  text "nRF52840" at 76.327,29.845 h4.57
  text "nano development kit" at 66.675,23.749 h2.03
  text "MCU USB" at 1.397,20.32 h1.02 r270
  text "NFC ANT" at 78.613,9.525 h1.02
  text "5" at 39.446,8.788 h5.08
  text "170421" at 13.462,2.032 h1.02
  text "DNN" at 17.526,2.032 h1.02

## Text inside footprints (layer, text, board x,y; h text height)
U2: Mechanical 7 "ANTEN AREA" at 83.227,32.909 h1.14 r270